# Altium PCB ESP32Cam Mounting PCB.PcbDoc
Units mm, origin at the board's own origin, x right, y up, seen from the top; angles counter-clockwise.
Board outline 31 x 40 mm, 2 copper layers (Top Layer, Bottom Layer); 4 components, 15 nets, 32 pads, 88 vias.
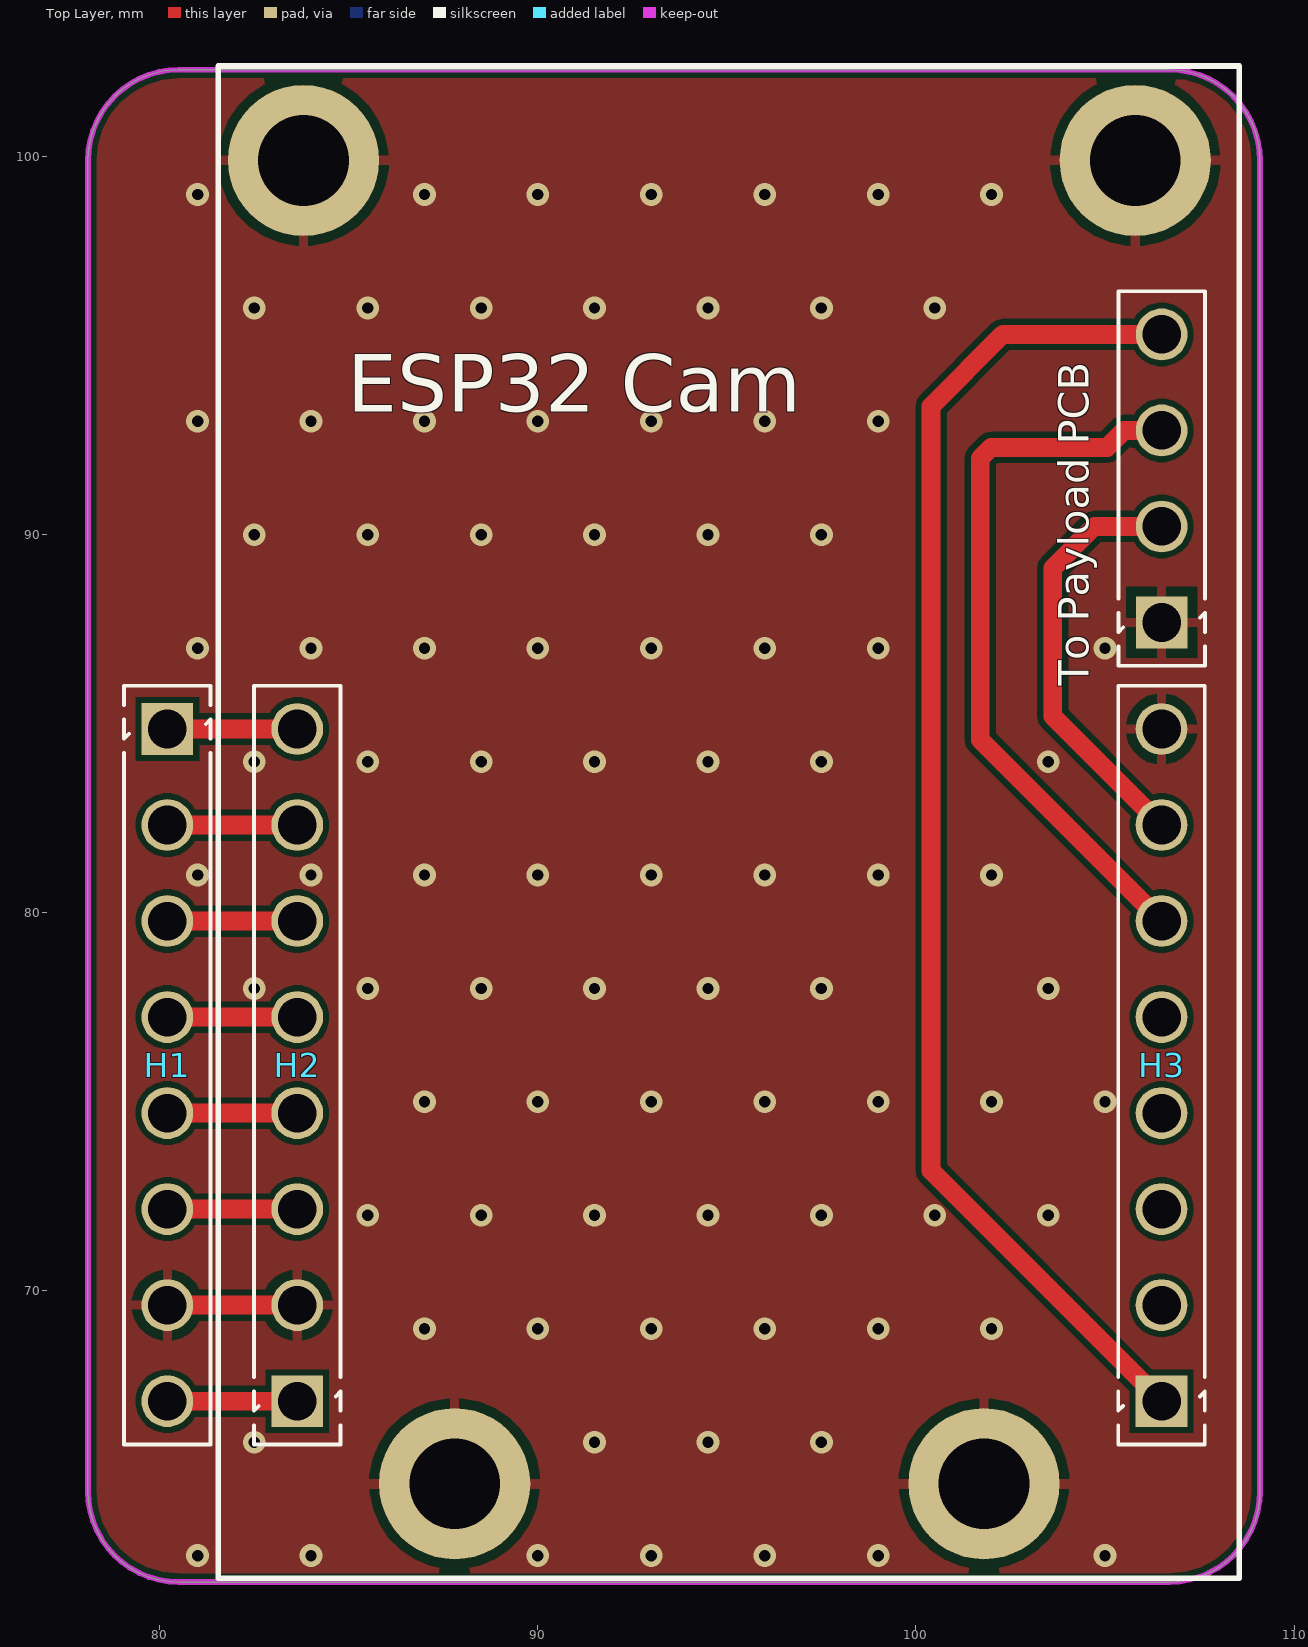
[diagram p0: Top Layer view]
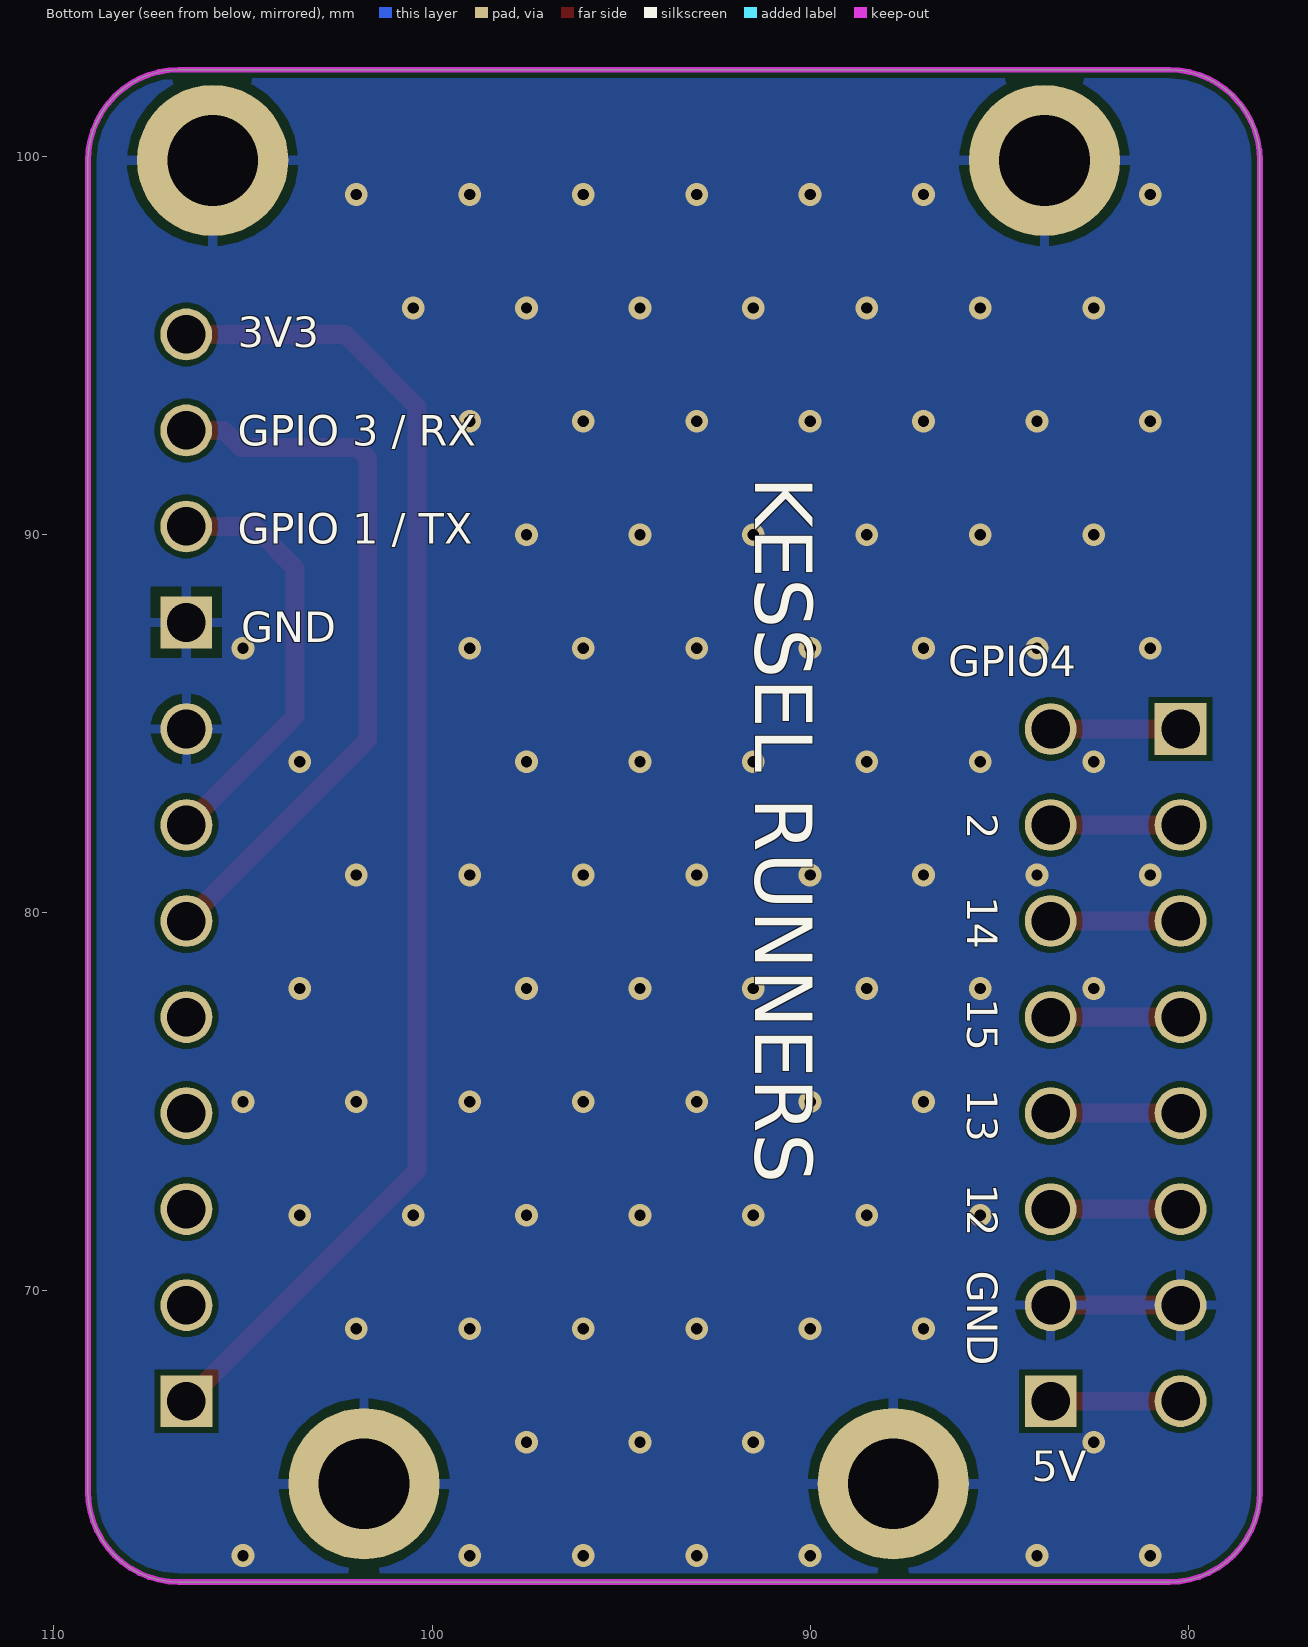
[diagram p1: Bottom Layer view, seen from below]

## Layer stack, top to bottom
Top Solder: solder mask 0.0102, Solder Resist, Dk 3.5
Top Layer: signal copper 0.0356
Dielectric 1: dielectric 0.32, FR-4, Dk 4.8
Bottom Layer: signal copper 0.0356
Bottom Solder: solder mask 0.0102, Solder Resist, Dk 3.5

## Board outline
78.1,64.7 78.1,99.9 cw(c80.5,99.9) 80.5,102.3 106.7,102.3 cw(c106.7,99.9) 109.1,99.9 109.1,64.7 cw(c106.7,64.7) 106.7,62.3 80.5,62.3 cw(c80.5,64.7)

## Design rules (kind name [scope] priority, off if disabled: settings)
Clearance [All] p1: gap=0.152 ignorepadtopadclearanceinfootprint=FALSE
HoleSize [All] p1: absolutevalues=TRUE maxlimit=6.2 minlimit=0.3 maxpercent=80.000 minpercent=20.000
MinimumAnnularRing [All] p1: minimumring=0.15
MinimumSolderMaskSliver [All] p1: minsoldermaskwidth=0.1
PolygonConnect ViaConnect [IsVia] p1: connectstyle=Direct reliefconductorwidth=0.254 reliefentries=4 polygonreliefangle="90 Angle" airgapwidth=0.254
PolygonConnect [All] p2: connectstyle=Relief reliefconductorwidth=0.254 reliefentries=4 polygonreliefangle="90 Angle" airgapwidth=0.254
RoutingVias [All] p1: holewidth=0.3 width=0.6 viastyle="Through Hole" minholewidth=0.3 minwidth=0.5 maxholewidth=1 maxwidth=5
SilkToSilkClearance [All] p1: silktosilkclearance=0.1
SilkToSolderMaskClearance [IsPad] p1: minsilkscreentomaskgap=0.1 clearancetoexposedcopper=TRUE
SolderMaskExpansion [All] p1: expansion=0.051 istentingtop=FALSE
SupplyNets "Schematic Supply Nets_2" [InNet('3V3')] p1: voltage=0.000
SupplyNets "Schematic Supply Nets_1" [InNet('GND')] p2: voltage=0.000
SupplyNets "Schematic Supply Nets" [InNet('5V')] p3: voltage=0.000
Width [All] p1: maxlimit=25.4 minlimit=0.15 preferedwidth=0.3
26 further rules are at their usual default settings.

## Components (designator, comment, footprint, x,y, rotation, side; value= is the part's Value field where it differs from the comment)
H1 "8 Pin Header" "8 Pin Header" 80.2,75.973 r270 top
H2 "8 Pin Header" "8 Pin Header" 83.636,75.973 r90 top
H3 "8 Pin Header" "8 Pin Header" 106.496,75.973 r90 top
"To Payload PCB" "Header - 2.54mm,1x4-pin" HEADER_2.54MM_1x4PIN 106.5,91.49 r90 top (schematic designator H4)

## Footprints (in the part's own frame and the unit in brackets; to place one, negate y for a bottom-side part, rotate by r counter-clockwise, add the part's x,y. Pads: shape width x height; smd on the part's side, far side on the other; paste and mask are expansions set on the pad)
"8 Pin Header" [mm]
  rect 1.37x1.37 hole 1.02: 1(-8.89,0)
  round 1.37 hole 1.02: 2(-6.35,0) 3(-3.81,0) 4(-1.27,0) 5(1.27,0) 6(3.81,0) 7(6.35,0) 8(8.89,0)
  silkscreen extent -10.03,-1.14 10.03,1.14
HEADER_2.54MM_1x4PIN [mm]
  rect 1.37x1.37 hole 1.02: 1(-3.81,0)
  round 1.37 hole 1.02: 2(-1.27,0) 3(1.27,0) 4(3.81,0)
  silkscreen extent -4.95,-1.14 4.95,1.14

## Free pads (board coordinates)
  round 4 hole 2.4: 3(83.8,99.9) 3(87.8,64.9) 3(101.8,64.9) 3(105.8,99.9)

## Via types
v1: diameter 0.6, hole 0.3, Top Layer to Bottom Layer, tented top, 88 vias

## Nets (pads, with @x,y where several pads share a name; then routed paths per layer and width w, separated by ;. In a path a pad name is that pad's centre, name@x,y a point inside that pad or via, vN(x,y) a via of type N, cw(c..) or ccw(c..) an arc to the next point about the centre after c; other vN are vias at no path point)
3V3: "To Payload PCB.4" H3.1 | length 35.7
  Top Layer w0.5: H3.1 100.4,73.179 100.4,93.4 102.3,95.3 106.5,95.3
5V: H1.8 H2.1 | length 3.4
  Top Layer w0.5: H1.8 H2.1
GND: "To Payload PCB.1" H1.7 H2.2 H3.8 pad.3 | length 3.4
  Top Layer w0.5: H1.7 H2.2
  other v1: 81,63 84,63 90,63 93,63 96,63 99,63 105,63 82.5,66 91.5,66 94.5,66 97.5,66 87,69 90,69 93,69 96,69 99,69 102,69 85.5,72 88.5,72 91.5,72 94.5,72 97.5,72 100.5,72 103.5,72 87,75 90,75 93,75 96,75 99,75 102,75 105,75 82.5,78 85.5,78 88.5,78 91.5,78 94.5,78 97.5,78 103.5,78 81,81 84,81 87,81 90,81 93,81 96,81 99,81 102,81 82.5,84 85.5,84 88.5,84 91.5,84 94.5,84 97.5,84 103.5,84 81,87 84,87 87,87 90,87 93,87 96,87 99,87 105,87 82.5,90 85.5,90 88.5,90 91.5,90 94.5,90 97.5,90 81,93 84,93 87,93 90,93 93,93 96,93 99,93 82.5,96 85.5,96 88.5,96 91.5,96 94.5,96 97.5,96 100.5,96 81,99 87,99 90,99 93,99 96,99 99,99 102,99
"GPIO 1 / TX": "To Payload PCB.2" H3.7 | length 11.3
  Top Layer w0.5: H3.7 103.619,85.2 103.619,89.119 104.72,90.22 106.5,90.22
"GPIO 2": H1.2 H2.7 | length 3.4
  Top Layer w0.5: H1.2 H2.7
"GPIO 3 / RX": "To Payload PCB.3" H3.6 | length 19.3
  Top Layer w0.5: H3.6 101.7,84.579 101.7,92.02 101.993,92.313 105.059,92.313 105.506,92.76 106.5,92.76
"GPIO 4": H1.1 H2.8 | length 3.4
  Top Layer w0.5: H1.1 H2.8
"GPIO 12": H1.6 H2.3 | length 3.4
  Top Layer w0.5: H1.6 H2.3
"GPIO 13": H1.5 H2.4 | length 3.4
  Top Layer w0.5: H1.5 H2.4
"GPIO 14": H1.3 H2.6 | length 3.4
  Top Layer w0.5: H1.3 H2.6
"GPIO 15": H1.4 H2.5 | length 3.4
  Top Layer w0.5: H1.4 H2.5
NetH3_2: H3.2 | length 0.1
  Top Layer w0.254: H3.2 H3.2@106.592,69.527
NetH3_3: H3.3
NetH3_4: H3.4
NetH3_5: H3.5

## Polygon pours and split planes (outlines as drawn)
GND on Top Layer "GND_L01_P000" (solid, pour order 0): 78.1,64.7 78.1,99.9 cw(c80.5,99.9) 80.5,102.3 106.7,102.3 cw(c106.7,99.9) 109.1,99.9 109.1,64.7 cw(c106.7,64.7) 106.7,62.3 80.5,62.3 cw(c80.5,64.7)
GND on Bottom Layer "GND_L02_P001" (solid, pour order 1): 78.1,64.7 78.1,99.9 cw(c80.5,99.9) 80.5,102.3 106.7,102.3 cw(c106.7,99.9) 109.1,99.9 109.1,64.7 cw(c106.7,64.7) 106.7,62.3 80.5,62.3 cw(c80.5,64.7)

## Keep-outs
Keep-Out Layer:
  lines w0.15: 78.1,64.7 ccw(c80.5,64.7) 80.5,62.3 ; 78.1,64.7 ccw(c80.5,64.7) 80.5,62.3 ; 78.1,64.7 78.1,99.9 ; 78.1,64.7 78.1,99.9 ; 78.1,99.9 cw(c80.5,99.9) 80.5,102.3 ; 78.1,99.9 cw(c80.5,99.9) 80.5,102.3 ; 80.5,62.3 106.7,62.3 ; 80.5,62.3 106.7,62.3 ; 80.5,102.3 106.7,102.3 ; 80.5,102.3 106.7,102.3 ; 106.7,62.3 ccw(c106.7,64.7) 109.1,64.7 ; 106.7,62.3 ccw(c106.7,64.7) 109.1,64.7 ; 106.7,102.3 cw(c106.7,99.9) 109.1,99.9 ; 106.7,102.3 cw(c106.7,99.9) 109.1,99.9 ; 109.1,64.7 109.1,99.9 ; 109.1,64.7 109.1,99.9

## Silkscreen, mask and mechanical layers (free items; w line width, h text height)
Top Overlay:
  lines w0.15: 81.55,62.4 108.55,62.4 108.55,102.4 81.55,102.4 81.55,62.4
  text "ESP32 Cam" at 84.954,93.254 h1.52
Bottom Overlay:
  text "3V3" at 105.14,94.96 h0.8
  text "GPIO 3 / RX" at 105.14,92.36 h0.8
  text "KESSEL RUNNERS" at 91.446,91.546 h1.52 r90
  text "GPIO 1 / TX" at 105.14,89.76 h0.8
  text "GND" at 105.04,87.16 h0.8
  text "GPIO4" at 86.34,86.26 h0.8
  text "2" at 85.84,82.64 h0.8 r90
  text "14" at 85.84,80.44 h0.8 r90
  text "15" at 85.84,77.74 h0.8 r90
  text "13" at 85.84,75.34 h0.8 r90
  text "12" at 85.84,72.84 h0.8 r90
  text "GND" at 85.84,70.54 h0.8 r90
  text "5V" at 84.14,64.96 h0.8
Board Outline:
  lines w0.15: 78.025,64.7 ccw(c80.5,64.7) 80.5,62.225 106.7,62.225 ccw(c106.7,64.7) 109.175,64.7 109.175,99.9 ccw(c106.7,99.9) 106.7,102.375 80.5,102.375 ccw(c80.5,99.9) 78.025,99.9 78.025,64.7